# Altium PCB ESM-4G-V1.1.PcbDoc
Units mm, origin at the board's own origin, x right, y up, seen from the top; angles counter-clockwise.
Board outline 60 x 90 mm, 2 copper layers (Top Layer, Bottom Layer), stack 1.601 mm thick; 74 components, 62 nets, 279 pads, 316 vias.
Unrouted connection lines stored in the file: 1.
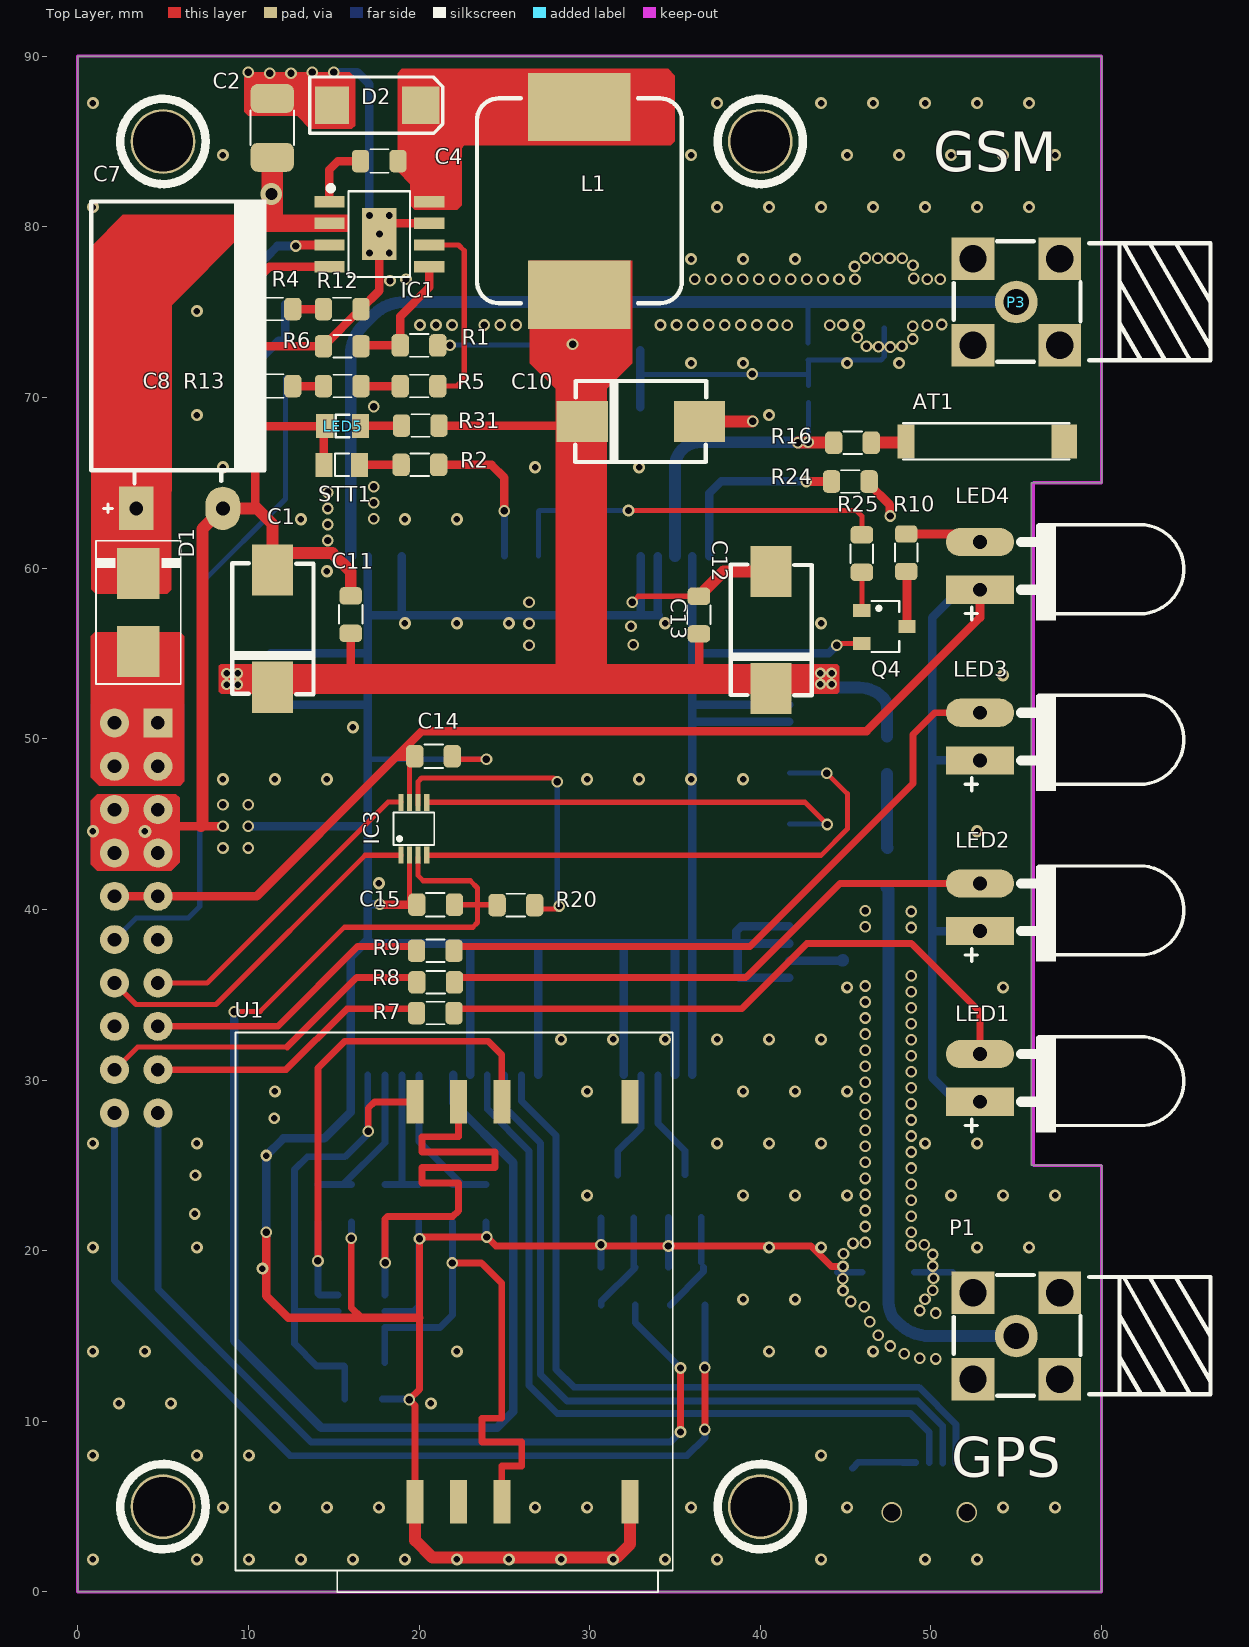
[diagram p0: Top Layer view]
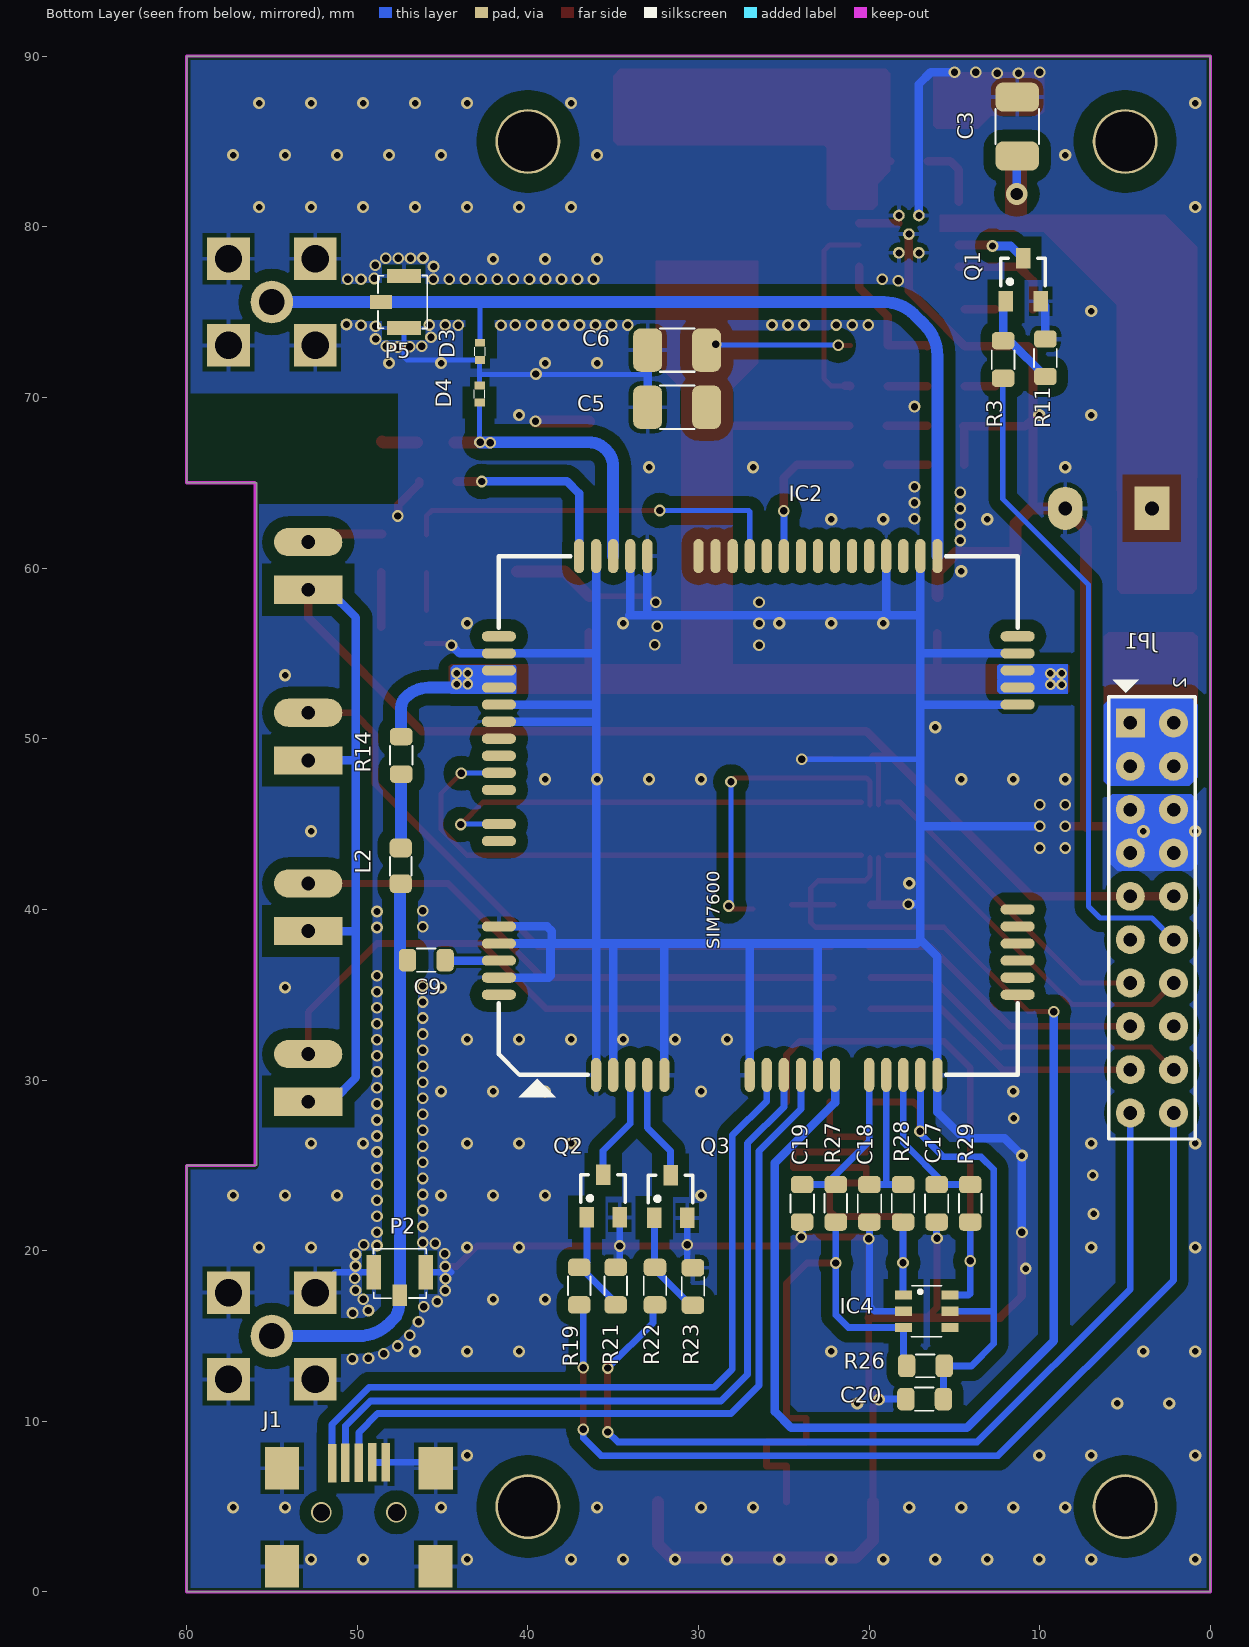
[diagram p1: Bottom Layer view, seen from below]
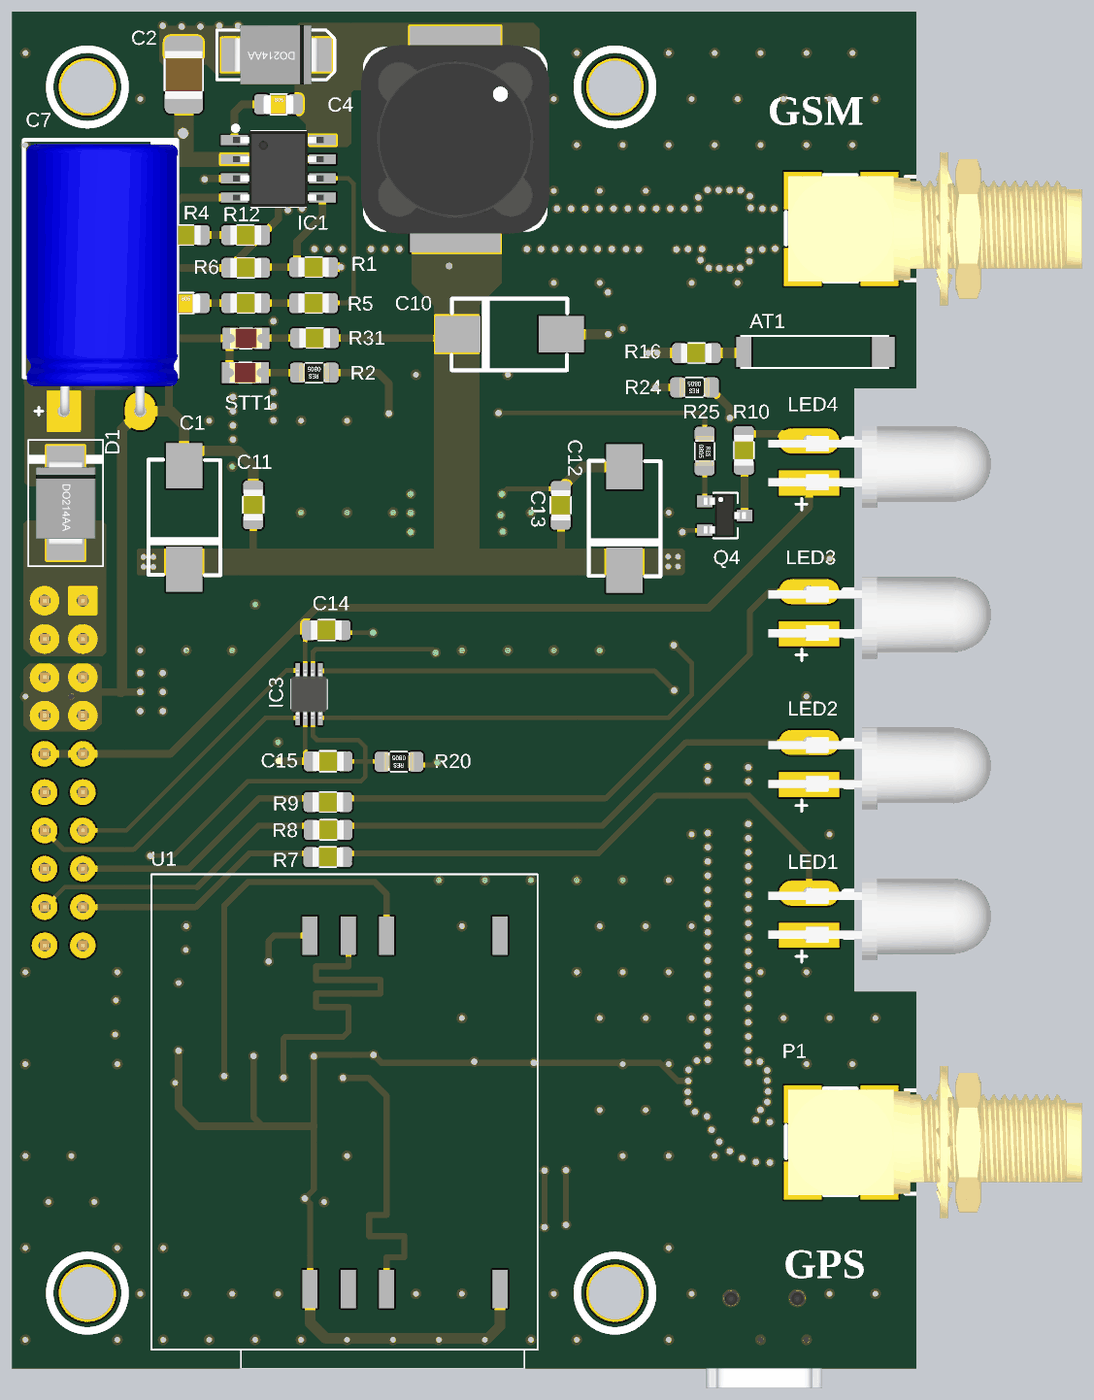
[diagram p2: 3D render of the assembled board from above, using the file's embedded part models]
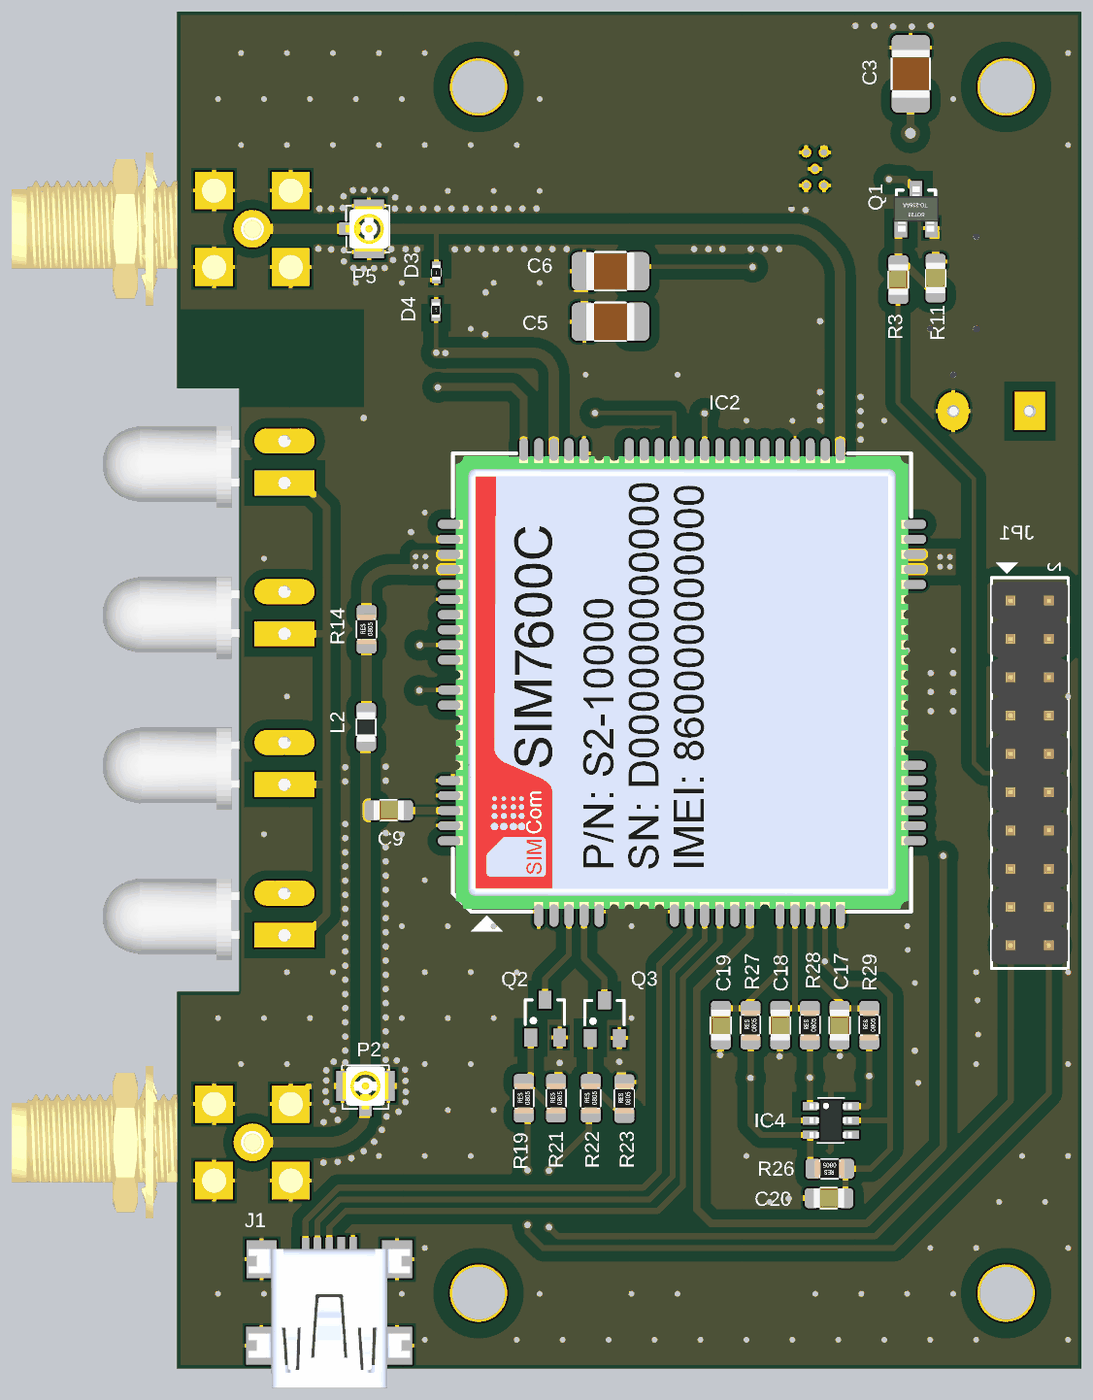
[diagram p3: 3D render of the assembled board from below, using the file's embedded part models]

## Layer stack, top to bottom
Top Solder: solder mask 0.0102, Solder Resist, Dk 3.5
Top Layer: signal copper 0.0356
Dielectric 1: core 1.53, FR-4, Dk 4
Bottom Layer: signal copper 0.0356
Bottom Solder: solder mask 0.0102, Solder Resist, Dk 3.5

## Board outline
0,0 0,90 60,90 60,65 55.88,65 55.88,25 60,25 60,0

## Design rules (kind name [scope] priority, off if disabled: settings)
Clearance Clearance_1 [OnLayer('Keep-Out Layer')] p1: gap=0.152 ignorepadtopadclearanceinfootprint=FALSE except(0: Arc-Hole Track-Hole SMDPad-Hole THPad-Hole Via-Hole Fill-Hole Poly-Hole Region-Hole Text-Hole)
Clearance Clearance_ATN [InNet('NetC9_1') or InNet('NetP1_1')] p2: gap=0.152 ignorepadtopadclearanceinfootprint=FALSE except(0: Arc-Hole Track-Hole SMDPad-Hole THPad-Hole Via-Hole Fill-Hole Poly-Hole Region-Hole Text-Hole)
Clearance Clearance_GND [inPolygon] p3: gap=0.686 ignorepadtopadclearanceinfootprint=FALSE except(0: Arc-Hole Track-Hole SMDPad-Hole THPad-Hole Via-Hole Fill-Hole Poly-Hole Region-Hole Text-Hole)
Clearance [All] p4: gap=0.152 ignorepadtopadclearanceinfootprint=FALSE except(0: Arc-Hole Track-Hole SMDPad-Hole THPad-Hole Via-Hole Fill-Hole Poly-Hole Region-Hole Text-Hole)
ComponentClearance [All] p1: gap=0.127 collisioncheckmode=3 verticalgap=0.127 showdistances=FALSE
Height [All] p1: minheight=-12.7 maxheight=25.4 prefheight=10
HoleSize [All] p1: absolutevalues=TRUE maxlimit=5 minlimit=0.025 maxpercent=80.000 minpercent=20.000
HoleToHoleClearance [All] p1: gap=0.152 allowstackedmicrovias=TRUE
MinimumSolderMaskSliver [All] p1: minsoldermaskwidth=0.051
PlaneConnect [All] p1: planeconnectstyle=Relief reliefexpansion=0.5 reliefentries=4 reliefconductorwidth=0.8 reliefairgap=0.5
PolygonConnect PolygonConnect_VIA [isvia] p1: connectstyle=Direct reliefconductorwidth=0.254 reliefentries=4 polygonreliefangle="90 Angle" airgapwidth=0.254
PolygonConnect [All] p2: connectstyle=Relief reliefconductorwidth=0.254 reliefentries=4 polygonreliefangle="90 Angle" airgapwidth=0.254
RoomDefinition ESM-4G-V1.1 [InComponentClass('ESM-4G-V1.1')] p1: confinementstyle=ConfineIn formatcopy=TRUE lockcomponents=FALSE outline -236.855,-199.263 -186.055,-199.263 -186.055,-173.863 -236.855,-173.863
RoutingVias [All] p1: holewidth=0.432 width=0.686 viastyle="Through Hole" minholewidth=0.432 minwidth=0.686 maxholewidth=0.432 maxwidth=0.686
SilkToSilkClearance [All] p1: silktosilkclearance=0.127
SilkToSolderMaskClearance [IsPad] p1: minsilkscreentomaskgap=0.025 clearancetoexposedcopper=TRUE
SolderMaskExpansion [All] p1: expansion=0.127 istentingtop=FALSE
Width Atena [InNet('NetP1_1')or InNet('NetC9_1')] p1: maxlimit=1.1 minlimit=0.7 preferedwidth=1.1
Width [All] p2: maxlimit=0.7 minlimit=0.3 preferedwidth=0.5
22 further rules are at their usual default settings.

## Components (designator, comment, footprint, x,y, rotation, side; value= is the part's Value field where it differs from the comment)
AT1 "AMCA92-2R660G-S1F-T" "Antena-Chip - LTE" 53.175,67.425 r180 top value="R1/4W - 1K"
C1 "470uF/10V" EEFSDE 11.425,56.45 r90 top
C2 "2.2uF/50V" C-1210 11.4,85.8 r270 top
C3 "2.2uF/50V" C-1210 11.325,85.875 r270 bottom
C4 "100nF" C-0805 17.673,83.852 r0 top
C5 "47uF/16V" C-1210 31.25,69.425 r180 bottom
C6 "47uF/16V" C-1210 31.25,72.775 r180 bottom
C7 "1000uF/50V" CP5-10X16N 5.969,63.5 r90 top
C8 "6.8nF" C-0805 11.5,70.666 r0 top
C9 "33pF" C-0805 45.95,37.025 r0 bottom value=103
C10 "470uF/10V" EEFSDE 33,68.6 r0 top value=1000uF/16V
C11 "100nF" C-0805 16,57.275 r90 top value=103
C12 "100uF/10V" EEFSDE 40.625,56.375 r90 top value=1000uF/16V
C13 "100nF" C-0805 36.4,57.25 r90 top value=103
C14 "100nF" C-0805 20.85,48.975 r0 top value=103
C15 "100nF" C-0805 20.975,40.275 r180 top value=103
C17 "22pF" C-0805 16.045,22.775 r270 bottom value=103
C18 "22pF" C-0805 19.985,22.775 r270 bottom value=103
C19 "22pF" C-0805 23.925,22.775 r270 bottom value=103
C20 "100nF" C-0805 16.75,11.3 r0 bottom value=103
D1 "1N5408" SMB#1 3.556,57.404 r90 top
D2 "B360C" SMB#2 17.5,87.128 r180 top
D3 "LXES15AAA1-153" R-0402 42.8,72.7 r90 bottom value="Diode c?m 1N5408"
D4 "LXES15AAA1-153" R-0402 42.825,70.2 r270 bottom value="Diode c?m 1N5408"
IC1 "TPS54360" "SOIC-8 - PW" 17.673,79.568 r0 top
IC2 "SIM7600E-H" SIM7600 26.5,45.5 r90 bottom
IC3 "TXB0102DCUR" US8 19.7,44.725 r90 top
IC4 "TPD4E001" "SOT23-6 - 2" 16.625,16.45 r180 bottom
J1 "USB-5" USB-M2 49.825,4.125 r0 bottom
JP1 "Header 10X2" JP10X2-FMD-2.54 3.429,39.497 r270 bottom
L1 "8.2uH/5A" L-L-12X12 29.4,81.525 r270 top
L2 "47nH" L-0805 47.45,42.55 r270 bottom value="150 mH"
LED1 "LED" LED-5-N 53,30 r0 top
LED2 "LED" LED-5-N 53,40 r0 top locked
LED3 "LED" LED-5-N 53,50 r0 top locked
LED4 "LED" LED-5-N 53,60 r0 top locked
LED5 "LED" LED-0805 15.525,68.325 r180 top
P1 "Antenna" IPXS_1 55,15 r0 top
P2 "Antenna" IPXS 47.5,18 r270 bottom
P3 "Antenna" IPXS_1 55,75.59 r0 top
P5 "Antenna" IPXS 48,75.59 r0 bottom
Q1 "C1815" "SOT23-3 TRAN" 10.967,76.9 r180 bottom
Q2 "C1815" SOT23#1 35.6,23.2 r180 bottom
Q3 "C1815" SOT23#1 31.647,23.168 r180 bottom
Q4 "C1815(MMBT4401)" SOT23#2 47.275,56.575 r270 top
R1 "10K" R-0805 20,73.05 r0 top
R2 "1k" R-0805 20.075,68.35 r0 top
R3 "1k" R-0805 12.15,72.225 r270 bottom
R4 "150k" R-0805 11.5,75.178 r180 top
R5 "12k" R-0805 20,70.666 r0 top
R6 "4k7" R-0805 15.5,73 r0 top
R7 "220R" R-0805 20.95,33.925 r0 top
R8 "220R" R-0805 20.975,35.725 r0 top
R9 "220R" R-0805 20.95,37.575 r0 top
R10 "220R" R-0805 48.55,60.9 r90 top
R11 "10k" R-0805 9.675,72.325 r270 bottom
R12 "12k" R-0805 15.5,75.178 r180 top
R13 "1k" R-0805 15.5,70.666 r0 top
R14 "10R" R-0805 47.425,49.025 r90 bottom value="R1/4W - 1K"
R16 "0R" R-0805 45.4,67.35 r0 top value="R1/4W - 1K"
R19 "1k" R-0805 36.991,17.925 r90 bottom
R20 "10k" R-0805 25.675,40.25 r180 top
R21 "10K" R-0805 34.85,17.925 r90 bottom
R22 "1k" R-0805 32.55,17.925 r90 bottom
R23 "10K" R-0805 30.325,17.9 r90 bottom
R24 "10k" R-0805 45.275,65.075 r180 top
R25 "470R" R-0805 45.95,60.85 r270 top value="R1/4W - 1K"
R26 "10k" R-0805 16.7,13.25 r0 bottom
R27 "22R" R-0805 21.955,22.775 r90 bottom
R28 "22R" R-0805 18.015,22.775 r90 bottom
R29 "22R" R-0805 14.075,22.775 r90 bottom
R31 "470R" R-0805 20.05,66.05 r180 top value="R1/4W - 1K"
STT1 "LED" LED-SMD-0805 15.475,66.05 r180 top value="LED 3 ly Single Colour"
U1 "Sim holder" SIM_HOLDER 22.315,17 r0 top

## Footprints (in the part's own frame and the unit in brackets; to place one, negate y for a bottom-side part, rotate by r counter-clockwise, add the part's x,y. Pads: shape width x height; smd on the part's side, far side on the other; paste and mask are expansions set on the pad)
"Antena-Chip - LTE" [mm]
  rect 1x2 smd: 1(4.625,0)
  rect 1.5x2 smd: 2(-4.625,0)
  silkscreen extent -4.95,-1.07 4.8,1.07, body extent -4.93,-0.99 4.75,0.99, height 1.21
C-0805 [mil] "Compoment SMD 80x50mil"
  rrect50% 40x52 smd: 1(-43.31,0) 2(43.31,0)
  silkscreen extent -21,-27 22,27, body extent -39,-26 39,24, height 31
C-1210 [mil]
  rrect50% 67x100 smd: 1(-68,0) 2(68,0)
  silkscreen extent -40,-50 40,50, body extent -63,-49 63,49, height 98
CP5-10X16N [mil] "Tu hoa 1000uF/16V/25V/50V"
  rect 100x80 hole 32: 1(0,100)
  oval 100x80 hole 32: 2(0,-100)
  silkscreen extent -10,-196 708,204, body extent -12,-199 697,197, height 395
EEFSDE [mm]
  rect 3x2.4 smd: 1(-3.429,0) 2(3.429,0)
  silkscreen extent -3.84,-2.39 3.84,2.36, body extent -3.81,-2.15 3.81,2.15, height 4.21
IPXS [mil] "SOT 23 _ 1-3-2"
  rect 50x33 smd: 1(24,0)
  rect 79x33 smd: 2(-29,-60) 3(-29,60)
  silkscreen extent -83,-61 31,61, body extent -80,-59 32,59, height 50
IPXS_1 [mm]
  round 2.5 hole 1.5 paste-2539.97: 1(0,0)
  rect 2.5x2.5 hole 1.6: 2(-2.54,-2.54) 2(-2.54,2.54) 2(2.54,-2.54) 2(2.54,2.54)
  silkscreen extent -3.66,-3.51 11.38,3.57, body extent -3.52,-5.11 15.98,5.09, height 11.7
JP10X2-FMD-2.54 [mm]
  rect 1.7x1.7 hole 0.8: 1(-11.43,-1.27)
  round 1.7 hole 0.8: 2(-11.43,1.27) 3(-8.89,-1.27) 4(-8.89,1.27) 5(-6.35,-1.27) 6(-6.35,1.27) 7(-3.81,-1.27) 8(-3.81,1.27) 9(-1.27,-1.27) 10(-1.27,1.27) 11(1.27,-1.27) 12(1.27,1.27) 13(3.81,-1.27) 14(3.81,1.27) 15(6.35,-1.27) 16(6.35,1.27) 17(8.89,-1.27) 18(8.89,1.27) 19(11.43,-1.27) 20(11.43,1.27)
  silkscreen extent -13.97,-2.54 12.95,2.54, body extent -12.7,-2.54 12.7,2.54, height 5.55
L-0805 [mm] "Compoment SMD 80x50mil"
  rrect50% 1.1x1.3 smd: 1(-1.05,0) 2(1.05,0)
  silkscreen extent -0.53,-0.64 0.56,0.64, body extent -1,-0.6 1,0.6, height 0.95
L-L-12X12 [mm]
  rect 4x6 smd: 1(-5.5,0) 2(5.5,0)
  silkscreen extent -6,-6 6,6, body extent -6.25,-6.25 6.25,6.25, height 6.7
LED-5-N [mil]
  rect 157.48x65 hole 32: 1(-5,-50)
  oval 157.48x65 hole 32: 2(-5,60)
  silkscreen extent -39,-120 465,100, body extent -111,-115 471,98, height 130
LED-0805 [mm]
  rect 1x1.397 smd: 1(-1.05,0) 2(1.05,0)
  silkscreen extent -0.41,-0.66 0.41,0.66, body extent -1.05,-0.67 1.05,0.68, height 0.9
LED-SMD-0805 [mm]
  rect 1x1.397 smd: 1(-1.05,0) 2(1.05,0)
  silkscreen extent -0.41,-0.66 0.41,0.66, body extent -1.05,-0.67 1.05,0.68, height 0.9
R-0402 [mm]
  rect 0.457x0.6 smd: 1(-0.5,0) 2(0.5,0)
  silkscreen extent -0.25,-0.3 0.25,0.3, body extent -0.5,-0.25 0.5,0.25, height 0.35
R-0805 [mil] "Compoment SMD 80x50mil"
  rrect50% 40x52 smd: 1(-43.31,0) 2(43.31,0)
  silkscreen extent -21,-26 22,26, body extent -40,-25 40,25, height 24
SIM7600 [mm]
  oval 2x0.6 smd: 1(-15.2,9.5) 2(-15.2,8.5) 3(-15.2,7.5) 4(-15.2,6.5) 5(-15.2,5.5) 10(-15.2,0.5) 11(-15.2,-0.5) 12(-15.2,-1.5) 13(-15.2,-2.5) 14(-15.2,-3.5) 15(-15.2,-4.5) 17(-15.2,-6.5) 18(-15.2,-7.5) 19(-15.2,-8.5) 20(-15.2,-9.5) 41(15.2,-9.5) 42(15.2,-8.5) 43(15.2,-7.5) 44(15.2,-6.5) 45(15.2,-5.5) 46(15.2,-4.5) 47(15.2,-3.5) 48(15.2,-2.5) 49(15.2,-1.5) 50(15.2,-0.5) 51(15.2,0.5) 52(15.2,1.5) 53(15.2,2.5) 54(15.2,3.5) 57(15.2,6.5) 58(15.2,7.5) 59(15.2,8.5) 60(15.2,9.5) 81(-15.2,-10.5) 82(15.2,-10.5) 85(15.2,10.5)
  oval 0.6x2 smd: 21(-9.5,-15.2) 22(-8.5,-15.2) 23(-7.5,-15.2) 24(-6.5,-15.2) 25(-5.5,-15.2) 37(6.5,-15.2) 38(7.5,-15.2) 39(8.5,-15.2) 40(9.5,-15.2) 61(9.5,15.2) 62(8.5,15.2) 63(7.5,15.2) 64(6.5,15.2) 65(5.5,15.2) 66(4.5,15.2) 67(3.5,15.2) 68(2.5,15.2) 69(1.5,15.2) 71(-0.5,15.2) 72(-1.5,15.2) 77(-6.5,15.2) 78(-7.5,15.2) 79(-8.5,15.2) 80(-9.5,15.2) 83(10.5,-15.2) 84(-10.5,-15.2) 86(-10.5,15.2) 87(10.5,15.2)
  silkscreen extent -16.52,-15.2 15.2,15.2, body extent -15.29,-15.33 15.26,15.24, height 3.18
SIM_HOLDER [mm]
  rect 1x2.54 smd: 1(-2.542,11.72) 2(-0.002,11.72) 3(2.538,11.72) 4(10.058,11.72) 5(-2.542,-11.72) 6(-0.002,-11.72) 7(2.538,-11.72) 8(10.058,-11.72)
  silkscreen extent -13.07,-17.02 12.56,15.78, body extent -12.81,-17.02 12.3,15.27, height 3.5
SMB#1 [mm]
  rect 3x2.5 smd: 1(-2.286,0) 2(2.286,0)
  silkscreen extent -4.19,-2.48 4.19,2.48, body extent -2.79,-1.97 2.79,1.97, height 2.65
SMB#2 [mm]
  rect 2x2.2 smd: 1(2.6,0)
  rect 2.2x2.2 smd: 2(-2.6,0)
  silkscreen extent -3.9,-1.65 3.9,1.65, body extent -2.79,-1.97 2.79,1.98, height 2.6
"SOIC-8 - PW" [mil]
  rect 70x26 smd: 1(-115,75) 2(-115,25) 3(-115,-25) 4(-115,-75) 5(115,-75) 6(115,-25) 7(115,25) 8(115,75)
  round 27 hole 16: 9(-23,-43) 9(-23,43) 9(0,0) 9(23,-43) 9(23,43)
  rect 80x120 smd: 9(0,0)
  silkscreen extent -118,-99 71,112, body extent -119,-99 119,99, height 63
SOT23#1 [mm] "SOT 23 _ 1-3-2"
  rect 0.85x1.2 smd: 1(-0.94,-1.245) 2(0.985,-1.25) 3(0.005,1.25)
  silkscreen extent -1.29,-0.38 1.31,1.25, body extent -1.5,-1.5 1.52,1.5, height 1.27
SOT23#2 [mm] "SOT 23 _ 1-3-2"
  rect 0.762x1.016 smd: 1(-0.94,-1.321) 2(0.985,-1.321) 3(0.005,1.321)
  silkscreen extent -1.5,-0.76 1.5,0.86, body extent -1.45,-1.4 1.45,1.4, height 1.3
"SOT23-3 TRAN" [mm] "SOT23-3 1-3-2"
  rect 0.85x1.2 smd: 1(1.016,-1.26) 2(-0.018,1.26) 3(-1.016,-1.26)
  silkscreen extent -1.32,-0.37 1.28,1.26, body extent -1.5,-1.49 1.5,1.51, height 1.3
"SOT23-6 - 2" [mm] "SOT23, 5-Leads, Body 3.0x3.0mm (max), Pitch 0.95mm, IPC Medium Density"
  rect 1x0.55 smd: 1(-1.372,0.95) 2(-1.372,0) 3(-1.372,-0.95) 4(1.372,-0.95) 5(1.372,0) 6(1.372,0.95)
  silkscreen extent -0.89,-1.5 0.89,1.5, body extent -1.4,-1.45 1.4,1.45, height 1.45
US8 [mm] "Small Outline; 8 Leads; Body Width 3.9 mm; Pitch 1.27 mm"
  rect 1x0.3 smd: 1(-1.55,0.75) 2(-1.55,0.25) 3(-1.55,-0.25) 4(-1.55,-0.75) 5(1.55,-0.75) 6(1.55,-0.25) 7(1.55,0.25) 8(1.55,0.75)
  silkscreen extent -0.94,-1.19 0.94,1.19, body extent -1.6,-1.2 1.6,1.2, height 0.9
USB-M2 [mm]
  rect 0.5x2.25 smd: 1(1.651,-3.429) 2(0.864,-3.442) 3(0.076,-3.454) 4(-0.711,-3.467) 5(-1.499,-3.48)
  rect 2x2.5 smd: 5(-4.424,-3.124) 5(-4.42,2.616) 5(4.576,-3.124) 5(4.58,2.616)
  body extent -5.27,-3.8 5.43,5.4, height 3.95

## Part data
AT1 R14 R16: library part RES, "Resistor 1/4W"
C1 C7: library part CP
C2 C3: library part CN, "part C3225X7R2A225K230AB"
C4 C5 C6 C8: library part CN
C9 C11 C13 C14 C15 C17 C18 C19 C20: library part C, "Cap SMD"
C10 C12: library part CP4, "Cap 1000uF/16V - 220uF/50V", Description 1="2200uF-3300uF/6,3V - 1000uF-2200uF/10V", Description 2="1000uF/16V - 470uF => 1000uF/25V - 100uF/100V", Description 3=330uF>470uF/35V_220uF>470uF/50V_10uF>22uF/250V, Description 4="220uF => 330uF/63V - 10uF =>33uF/160 - 200V", Description 5="4,7uF>10uF/250V_3,3uF>10uF/400V - 2,2uF>4,7uF/450V"
D1: library part Diode, "Diode S3M 3A 1000V"
D2: library part "Diode scotky", "part: B560C-13-F"
D3 D4: library part 1N5822
IC1: "TPS54360 60 V Input, 3.5 A, Step Down DC-DC Converter with Eco-mode™"
IC2: "SIM7600E-H GSM/LTE CAT4/GPS"
IC3: "2-BIT BIDIRECTIONAL VOLTAGE-LEVEL TRANSLATOR"
J1: Manufacturer=FCI, Manufacturer Part Number=10118193-0001LF, Supplier Part Number 1=609-4616-1-ND, .Checked PCB=RF, .Checked SCH=MM, .Creator=MM, Category="Connectors, Interconnects", ComponentLink1Description=http://portal.fciconnect.com/Comergent//fci/drawing/10118193.pdf, ComponentLink1URL=http://portal.fciconnect.com/Comergent//fci/drawing/10118193.pdf, Connector Type="USB - micro B", Features="Shielded, Solder Retention", Gender=Receptacle, Ingress Protection=-, Mounting Type="Surface Mount, Right Angle, Horizontal", Number of Contacts=5, Packaging="Cut Tape (CT)", Pricing 1="1=0.46, 10=0.433, 25=0.3712, 50=0.3156, 100=0.3032, 250=0.27224, 500=0.25988 (USD)", RoHS="RoHS Compliant", Specifications="USB 2.0", Stock 1=28642, Supplier 1=Digi-Key
JP1: "Header, 10-Pin, Dual row", LatestRevisionDate=17-Jul-2002, LatestRevisionNote="Re-released for DXP Platform.", Publisher="Altium Limited"
L1: library part L1, "part: 7447797820"
L2: library part "Inductor Ferit", "Ferrite Beads Rated current > 1A"
P1 P2 P3 P5: library part IPXSx66, "Antenna GSM GPS"
Q2 Q3 Q4: library part NPN, "Transistor C1815, SOT23", Name=C1815
R1 R2 R3 R4 R5 R6 R7 R8 R9 R10 R11 R12 R13 R19 R20 R21 R22 R23 R24 R25 R26 R27 R28 R29 R31: library part R, "Resistor 1/4W"
STT1: "LED Single colour Green and Red"
U1: library part Component_1, valua="Sim holder"

## Free pads (board coordinates)
  round 3.8 hole 3.5: 0(5,5) 1(40,5) 2(40,85) 3(5,85)

## Via types
v1: diameter 0.686, hole 0.432, Top Layer to Bottom Layer, tented both sides, 168 vias
v2: diameter 0.711, hole 0.381, Top Layer to Bottom Layer, tented both sides, 131 vias
v3: diameter 0.635, hole 0.381, Top Layer to Bottom Layer, tented both sides, 8 vias
v4: diameter 0.686, hole 0.381, Top Layer to Bottom Layer, tented both sides, 5 vias
v5: diameter 1.2, hole 1, Top Layer to Bottom Layer, tented both sides, 2 vias
v6: diameter 0.762, hole 0.381, Top Layer to Bottom Layer, tented both sides, 1 vias
v7: diameter 1.27, hole 0.711, Top Layer to Bottom Layer, tented both sides, 1 vias

## Nets (pads, with @x,y where several pads share a name; then routed paths per layer and width w, separated by ;. In a path a pad name is that pad's centre, name@x,y a point inside that pad or via, vN(x,y) a via of type N, cw(c..) or ccw(c..) an arc to the next point about the centre after c; other vN are vias at no path point)
1V8: C15.1 IC2.15 IC3.3 R20.2 | length 85.1
  Top Layer w0.3: v1(9.175,34) 9.2,34.025 10.7,34.025 15.625,38.95 23.15,38.95 23.425,39.225 23.425,40.275 ; IC3.3@19.95,43.025 19.95,41.975 20.25,41.675 23,41.675 23.425,41.25 23.425,40.275 ; C15.1 23.425,40.275 ; R20.2@24.55,40.275 23.425,40.275
  Bottom Layer w0.3: v1@9.1,34 v1(9.175,34)
  Bottom Layer w0.5: v1(9.175,34) 9.175,14.725 14.275,9.625 24.575,9.625 25.525,10.575 25.525,25.15 22,28.675 IC2.15
3V3: C14.1 IC3.7 JP1.9 JP1.10 LED1.1 LED2.1 LED3.1 LED4.1 | length 102
  Top Layer w0.3: IC3.7@19.45,46.125 19.45,48.525 C14.1@19.5,48.575
  Top Layer w0.5: JP1.10 10.492,40.767 17.975,48.25 20.175,50.45 46.225,50.45 52.873,57.098 LED4.1 ; 18.675,48.95 C14.1@19.75,48.95
  Bottom Layer w0.5: 50.105,38.73 LED2.1 ; 50.145,48.73 LED3.1 ; LED1.1 51.495,28.73 50.075,30.15 50.075,57.1 51.705,58.73 LED4.1
3V8: C1.1 C5.2 C6.2 C10.1 C11.1 C12.1 C13.1 IC2.38 IC2.39 IC2.62 IC2.63 L1.2 R1.2 R2.2 R14.2 | length 52
  Top Layer w0.3: R1.2 v1(21.816,73.05) ; v1(29,73.125) 29.3,73.125 29.4,73.025
  Top Layer w0.5: 16,53.9 C11.1 ; R2.2 C10.1@28.921,68.35 ; L1.2 L1.2@29.4,75.578 ; L1.2@29.5,75.678 L1.2@29.4,75.578 ; 29.75,54 29.4,54.35 29.4,73.025 L1.2@29.4,75.578 ; 36.425,53.725 C13.1@36.425,56.225
  Bottom Layer w0.3: v1(21.816,73.05) ccw(c21.816,73.134) 21.875,73.075 29.254,73.075 cw(c29.254,72.904) 29.375,73.025 29.275,73.125 v1(29,73.125)
  Bottom Layer w0.7: IC2.63 45.787,53 cw(c45.787,51.037) 47.175,52.425 cw(c46.571,51.821) 47.425,51.821 R14.2
  other v3: 8.725,53.175 9.375,53.175 43.525,53.2 44.175,53.2 8.725,53.825 9.375,53.825 43.525,53.85 44.175,53.85
A: AT1.2
CLK: IC4.6 R29.1 U1.3 | length 31.2
  Top Layer w0.4: v1(14.075,19.4) 14.075,30.7 15.65,32.275 24.05,32.275 24.853,31.472 U1.3
  Bottom Layer w0.4: R29.1 v1(14.075,19.4) 14.075,17.5 14.175,17.4 IC4.6
CTRL-SIMPW: JP1.12 R3.2 | length 38.8
  Bottom Layer w0.3: JP1.12 3.432,39.5 6.475,39.5 7.15,40.175 7.15,59.025 12.175,64.05 R3.2@12.175,71.125
D+: IC2.13 J1.3 | length 45.6
  Bottom Layer w0.4: IC2.13 24,28.3 26.45,25.85 26.45,12.1 28.1,10.45 48.8,10.45 49.901,9.349 J1.3
D-: IC2.12 J1.2 | length 45.4
  Bottom Layer w0.4: IC2.12 25,28.425 27.125,26.3 27.125,12.75 28.675,11.2 49.225,11.2 50.689,9.736 J1.2
DATA: IC4.3 R26.2 R27.1 U1.7 | length 32.6
  Top Layer w0.4: v1(21.955,19.275) 23.65,19.275 24.853,18.072 24.853,11.5 24.853,10.18 23.686,10.18 23.686,8.78 24.853,8.78 26.021,8.78 26.021,7.38 24.853,7.38 24.853,5.98 U1.7
  Bottom Layer w0.4: R26.2@17.997,13.447 IC4.3 21.225,15.5 21.955,16.23 v1(21.955,19.275) R27.1
GND: C1.2 C2.1 C3.1 C5.1 C6.1 C7.2 C8.1 C10.2 C11.2 C12.2 C13.2 C14.2 C15.2 C17.2 C18.2 C19.2 C20.2 D2.1 D3.1 D4.1 IC1.7 IC1.9 IC2.1 IC2.2 IC2.5 IC2.10 IC2.14 IC2.37 IC2.40 IC2.41 IC2.43 IC2.57 IC2.58 IC2.60 IC2.61 IC2.64 IC2.65 IC2.77 IC2.78 IC2.80 IC2.81 IC3.2 IC4.2 J1.4 J1.5 JP1.5 JP1.6 JP1.7 JP1.8 LED5.2 P1.2 P2.2 P2.3 P3.2 P5.2 P5.3 Q1.1 Q2.2 Q3.2 Q4.2 R6.1 R11.1 R12.1 R21.2 R23.2 R24.1 STT1.2 U1.5 U1.8 | length 434.7
  Top Layer w0.3: C15.2@19.45,40.275 IC3.2@19.45,43.025 ; C14.2@22.175,48.8 v1(23.95,48.8) ; v1(32.5,58) 32.85,58.35 C13.2 ; v1(44.475,55.475) 44.59,55.59 Q4.2
  Top Layer w0.4: v1(16.025,20.725) 16.025,16.675 16.625,16.075 ; U1.5 19.773,10.927 v1(19.425,11.275) 20.025,11.875 20.025,16.075 v1(20.025,20.7) 20.125,20.8 v1(23.975,20.8) 24.5,20.275 v1(34.615,20.275) 42.973,20.275 44.173,19.075 v1(44.849,19.075)
  Top Layer w0.5: 5.75,44.875 7.225,44.875 v1(8.509,44.875) ; 10.4,63.6 10.4,68.775 ; v1(11.05,21.075) 11.05,17.35 12.325,16.075 16.625,16.075 20.025,16.075 ; STT1.2 LED5.2@14.425,68.275 ; LED5.2 10.85,68.325 10.4,68.775 ; IC1.9@17.673,79.568 17.673,76.252 R12.1 16.578,75.178 R6.1 10.675,73 10.4,72.725 C8.1 10.4,68.775 ; v1(17.7,40.3) 17.725,40.275 19.45,40.275 C15.2 ; IC1.9@18.308,80.203 IC1.7 ; R24.1 46.375,64.923 47.582,63.715 47.582,63.086 v1(47.618,63.05)
  Top Layer w0.7: 7.225,44.875 7.3,44.95 7.3,62.291 C7.2 10.5,63.5 11.425,62.575 11.425,60.875 14.925,60.875 16,59.8 C11.2 ; U1.5 19.773,3.027 20.791,2.009 31.584,2.009 32.373,2.798 U1.8 ; C13.2 37.854,59.804 C12.2 ; C10.2 v1(39.55,68.6)
  Bottom Layer w0.3: 17.025,48.8 v1(23.95,48.8) v1@23.95,48.625 ; 32.977,71.3 33.027,71.35 v1@39.529,71.35 ; v1(39.529,71.375) v1@39.529,71.35 ; D4.1 42.825,71.35 ; P5.3 47.263,72.388 47.075,72.2 D3.1 cw(c42.74,72.14) 42.825,72.14 42.825,71.35 ; v1@39.529,71.35 42.825,71.35
  Bottom Layer w0.4: v1(16.025,20.725) 16.045,20.745 C17.2 ; C20.2 19.4,11.3 v1(19.425,11.275) ; IC4.2 19.675,16.45 19.985,16.76 C18.2 ; C19.2 23.925,20.85 v1(23.975,20.8) ; R23.2@30.661,19.025 v1(30.661,20.35) Q3.2 ; R21.2@34.615,19.025 v1(34.615,20.275) Q2.2 ; v1(44.849,19.075) 44.511,18.737 P2.3 ; J1.5@45.401,7.249 45.757,7.605 48.326,7.605 48.339,7.592 J1.4 ; P2.2 51.263,18.737 P1.2@52.46,17.54
  Bottom Layer w0.5: R11.1 9.675,75.364 Q1.1 ; v1(10,44.875) 16.875,44.875 ; v1(11.05,21.075) v4(11.05,25.575) 12.05,26.575 14.45,26.575 16,28.125 IC2.81 16,37.225 17,38.225 ; IC2.37 16.95,52 ; IC2.40 16.95,55 ; v1(15,89.057) 16.393,89.057 17.089,88.361 IC1.9@17.089,80.66 ; IC2.41 17,57.225 ; v1(17.7,40.3) 17,40.3 ; IC2.43 19,57.425 18.8,57.225 ; IC2.14 23,37.9 22.9,38 ; IC2.10 27,37.925 ; IC2.5 32,37.925 ; C5.1 32.977,71.3 C6.1 ; 33,57.25 IC2.57 ; IC2.58 34,57.275 34.05,57.225 18.8,57.225 ; IC2.2 35,37.95 ; IC2.1 36,38 ; IC2.60 36,38 ; 36.025,51 IC2.65 ; 36.05,52 IC2.64 ; 36.125,55 IC2.61 44,55 v1(44.475,55.475) ; IC2.80 38.775,36 38.675,36.1 38.675,38 ; IC2.78 38.675,38 ; IC2.77 38.875,39 38.6,38.725 38.6,38 ; 17,38.225 17,40.3 ; 17,38.225 17.225,38 22.9,38 ; 17,40.3 17,57.225 ; 17,57.225 18.8,57.225 ; 22.9,38 36,38 ; 36,38 38.6,38 ; 38.6,38 38.675,38
  other v1: 50.283,13.657 49.344,13.702 48.439,13.955 47.618,14.413 46.92,15.042 46.409,15.831 50.273,16.343 49.345,16.493 46.099,16.718 45.303,17.025 49.65,17.15 44.849,17.667 50.1,17.675 44.825,18.35 50.15,18.38 50.1,19.1 50.1,19.775 44.875,19.819 48.843,20.3 49.609,20.35 45.428,20.425 46.157,20.475 48.843,21.082 46.157,21.415 48.843,22.022 46.157,22.355 48.843,22.962 46.157,23.295 48.843,23.901 46.157,24.234 48.843,24.841 46.157,25.174 48.843,25.781 46.157,26.114 48.843,26.721 46.157,27.054 48.843,27.661 46.157,27.994 48.843,28.6 46.157,28.933 48.843,29.54 46.157,29.873 48.843,30.48 46.157,30.813 48.843,31.42 46.157,31.753 48.843,32.36 46.157,32.693 48.843,33.299 46.157,33.632 48.843,34.239 46.157,34.572 48.843,35.179 46.157,35.512 48.843,36.119 48.843,38.938 46.157,38.983 48.843,39.878 46.157,39.922 8.509,43.6 10,43.6 8.509,46.125 10,46.125 26.45,55.475 32.557,55.5 32.425,56.6 26.45,56.75 26.45,58 14.657,61.616 14.657,62.555 17.343,62.886 14.657,63.495 17.343,63.826 14.657,64.435 17.343,64.766 17.343,69.465 47.618,72.95 46.925,72.975 46.225,73 48.3,73 48.925,73.425 45.675,73.525 48.925,74.175 41.575,74.225 44.075,74.225 49.775,74.225 20.058,74.247 20.997,74.247 21.937,74.247 23.817,74.247 24.757,74.247 25.696,74.247 34.155,74.247 35.094,74.247 36.034,74.247 36.974,74.247 37.914,74.247 38.854,74.247 39.793,74.247 40.733,74.247 44.841,74.247 45.781,74.247 50.625,74.275 18.3,76.835 19.235,76.934 36.151,76.934 37.091,76.934 38.031,76.934 38.97,76.934 39.91,76.934 40.85,76.934 41.79,76.934 42.73,76.934 43.669,76.934 44.609,76.934 45.549,76.934 49.775,76.925 50.55,76.925 49,76.975 45.525,77.675 48.95,77.75 46.875,78.16 47.6,78.16 48.325,78.15 46.147,78.175 11.25,89 12.5,89 10,89.057 13.75,89.057
  other v2: 0.889,1.905 6.985,1.905 10.033,1.905 13.081,1.905 16.129,1.905 19.177,1.905 22.225,1.905 25.273,1.905 28.321,1.905 31.369,1.905 34.417,1.905 37.465,1.905 43.561,1.905 49.657,1.905 52.705,1.905 8.509,4.953 11.557,4.953 14.605,4.953 17.653,4.953 26.797,4.953 29.845,4.953 35.941,4.953 45.085,4.953 54.229,4.953 57.277,4.953 0.889,8.001 6.985,8.001 10.033,8.001 43.561,8.001 2.413,11.049 5.461,11.049 20.701,11.049 0.889,14.097 3.937,14.097 22.225,14.097 40.513,14.097 43.561,14.097 46.609,14.097 38.989,17.145 42.037,17.145 0.889,20.193 6.985,20.193 40.513,20.193 43.561,20.193 52.705,20.193 55.753,20.193 29.845,23.241 38.989,23.241 42.037,23.241 45.085,23.241 51.181,23.241 54.229,23.241 57.277,23.241 0.889,26.289 6.985,26.289 37.465,26.289 40.513,26.289 43.561,26.289 49.657,26.289 52.705,26.289 11.557,29.337 29.845,29.337 38.989,29.337 42.037,29.337 45.085,29.337 28.321,32.385 31.369,32.385 34.417,32.385 37.465,32.385 40.513,32.385 43.561,32.385 45.085,35.433 54.229,35.433 17.653,41.529 0.889,44.577 3.937,44.577 52.705,44.577 8.509,47.625 11.557,47.625 14.605,47.625 29.845,47.625 32.893,47.625 35.941,47.625 38.989,47.625 16.129,50.673 54.229,53.721 19.177,56.769 22.225,56.769 25.273,56.769 34.417,56.769 43.561,56.769 14.605,59.817 13.081,62.865 19.177,62.865 22.225,62.865 8.509,65.913 26.797,65.913 32.893,65.913 6.985,68.961 10.033,68.961 40.513,68.961 35.941,72.009 38.989,72.009 45.085,72.009 48.133,72.009 6.985,75.057 35.941,78.105 38.989,78.105 42.037,78.105 0.889,81.153 37.465,81.153 40.513,81.153 43.561,81.153 46.609,81.153 49.657,81.153 52.705,81.153 55.753,81.153 8.509,84.201 35.941,84.201 45.085,84.201 48.133,84.201 51.181,84.201 54.229,84.201 57.277,84.201 0.889,87.249 37.465,87.249 43.561,87.249 46.609,87.249 49.657,87.249 52.705,87.249 55.753,87.249
  other v4: 10.825,18.95 6.85,22.15 6.897,24.425 11.525,27.766
  other v6: 3.937,44.577
LED4: JP1.17 R7.1 | length 16.7
  Top Layer w0.4: JP1.17 12.2,30.607 15.768,34.175 R7.1@19.9,34.175
LED5: JP1.18 R8.1 | length 20
  Top Layer w0.3: JP1.18 2.182,30.607 3.5,31.925 12.275,31.925
  Top Layer w0.4: 12.275,31.925 16.35,36 R8.1@19.9,36
LED6: JP1.15 R9.1 | length 17.3
  Top Layer w0.4: JP1.15 11.722,33.147 16.4,37.825 R9.1@20.025,37.825
LED_NET: IC2.51 R25.1 | length 22.8
  Top Layer w0.3: v1(32.275,63.375) 45.625,63.375 45.95,63.05 R25.1
  Bottom Layer w0.3: IC2.51 27,63.325 27.05,63.375 v1(32.275,63.375)
NetAT1_1: AT1.1 R16.2 | length 2.1
  Top Layer w0.7: R16.2 48.369,67.35 ccw(c48.369,67.606) AT1.1
NetC2_2: C2.2 C3.2 C7.1 D1.2 IC1.2 | length 5.8
  Top Layer w1.27: 11.4,80.5 C2.2
  Bottom Layer w0.5: C3.2 11.35,84.123 v7(11.35,81.925)
NetC4_1: C4.1 IC1.1 | length 3.9
  Top Layer w0.5: IC1.1 14.752,83.352 15.252,83.852 C4.1
NetC4_2: C4.2 D2.2 IC1.8 L1.1 | length 4
  Top Layer w0.5: C4.2 20.198,83.852 20.594,83.456 IC1.8
NetC8_2: C8.2 R13.1 | length 1.8
  Top Layer w0.5: C8.2 R13.1
NetC9_1: C9.1 IC2.79 | length 3.2
  Bottom Layer w0.5: IC2.79 C9.1@44.79,37
  Bottom Layer w0.7: C9.1@44.79,37 ccw(c44.79,37.085) C9.1
NetC9_2: C9.2 L2.2 P1.1 P2.1 | length 32.8
  Bottom Layer w0.7: L2.2@47.4,41.275 47.5,41.175 P2.1 47.5,17.156 ccw(c49.841,17.156) 47.742,16.119 48.117,15.744 ccw(c49.913,17.54) 49.913,15 P1.1
NetC17_1: C17.1 IC2.19 R29.2 | length 9.9
  Bottom Layer w0.4: R29.2 15.075,23.875 ; C17.1 15.075,23.875 ; IC2.19 18,26.325 15.55,23.875 15.075,23.875
NetC18_1: C18.1 IC2.18 R28.2 | length 8.4
  Bottom Layer w0.4: R28.2 C18.1 ; 19,23.9 IC2.18
NetC19_1: C19.1 IC2.17 R27.2 | length 9.9
  Bottom Layer w0.4: IC2.17 20,26.4 22.525,23.875 22.94,23.875 ; R27.2 22.94,23.875 ; C19.1 22.94,23.875
NetD3_2: D3.2 IC2.82 P3.1 P5.1 | length 54.9
  Bottom Layer w0.3: D3.2 42.8,75.409 cw(c43.056,75.409) 42.875,75.59
  Bottom Layer w0.7: IC2.82 16,72.448 cw(c18.54,72.448) 16.744,74.244 17.346,74.846 cw(c19.143,73.05) 19.143,75.59 42.875,75.59 P5.1 P3.1
NetD4_2: D4.2 IC2.59 R16.1 | length 18.3
  Top Layer w0.7: v1(42.2,67.35) 42.74,67.35 ccw(c42.74,67.435) v1(42.8,67.375) 42.825,67.35 R16.1
  Bottom Layer w0.3: v1(42.8,67.375) ccw(c42.74,67.435) 42.825,67.435 D4.2
  Bottom Layer w0.7: IC2.59 35,65.924 cw(c36.451,65.924) 35.425,66.95 cw(c36.451,65.924) 36.451,67.375 v1@42.2,67.375 ; v1(42.2,67.35) 42.74,67.35 ccw(c42.74,67.435) v1(42.8,67.375)
NetIC1_3: IC1.3 Q1.2 | length 4.2
  Top Layer w0.5: v1(12.775,78.875) 12.717,78.933 IC1.3
  Bottom Layer w0.5: Q1.2 11.699,78.875 v1(12.775,78.875) v1@12.775,78.837
NetIC1_4: IC1.4 R4.2 | length 6.3
  Top Layer w0.5: R4.2 10.4,76.825 11.238,77.663 IC1.4
NetIC1_5: IC1.5 R1.1 R6.2 | length 7.6
  Top Layer w0.5: R6.2 16.65,73.05 R1.1 18.9,74.75 20.594,76.444 IC1.5
NetIC1_6: IC1.6 R5.2 | length 11.4
  Top Layer w0.3: IC1.6 22.317,78.933 22.65,78.6 22.65,71.1 22.225,70.675 R5.2@21.425,70.675
  Top Layer w0.5: R5.2 21.109,70.675 R5.2@21.425,70.675
NetIC2_3: IC2.3 Q2.3 | length 6.5
  Bottom Layer w0.4: IC2.3 34,27.45 35.595,25.855 Q2.3
NetIC2_4: IC2.4 Q3.3 | length 6.4
  Bottom Layer w0.4: Q3.3 31.642,25.842 33,27.2 IC2.4
NetIC2_85: IC2.85 R24.2 | length 11.2
  Top Layer w0.5: v1(42.7,65.075) R24.2
  Bottom Layer w0.5: IC2.85 37,64.375 37.725,65.1 42.7,65.1 v1(42.7,65.075)
NetIC3_6: IC3.6 R20.1 | length 18.5
  Top Layer w0.3: IC3.6@19.95,46.125 19.95,47.5 20.15,47.7 27.875,47.7 v1(28.1,47.475) ; R20.1@26.8,40.025 28.05,40.025 v1(28.225,40.2)
  Bottom Layer w0.3: v1(28.1,47.475) 28.1,40.325 v1(28.225,40.2)
NetL2_1: L2.1 R14.1 | length 4.3
  Bottom Layer w0.7: R14.1 47.425,43.66 ccw(c47.51,43.66) L2.1
NetLED1_2: LED1.2 R7.2 | length 36.5
  Top Layer w0.4: R7.2@22.1,34.175 38.9,34.175 42.725,38 48.85,38 52.873,33.977 LED1.2
NetLED2_2: LED2.2 R8.2 | length 33.1
  Top Layer w0.4: R8.2@22.1,36 39.15,36 44.674,41.524 LED2.2
NetLED3_2: LED3.2 R9.2 | length 38
  Top Layer w0.4: R9.2@22.225,37.825 39.4,37.825 48.95,47.375 48.95,50.25 50.224,51.524 LED3.2
NetLED4_2: LED4.2 R10.2 | length 4.5
  Top Layer w0.508: R10.2 52.397,62 LED4.2
NetLED5_1: LED5.1 R2.1 | length 2.4
  Top Layer w0.5: LED5.1@16.6,68.35 R2.1
NetQ1_3: Q1.3 R3.1 R11.2 | length 5.5
  Bottom Layer w0.5: R11.2 11.775,73.325 R3.1 Q1.3@12.15,75.473
NetQ2_1: Q2.1 R19.2 R21.1 | length 5.6
  Bottom Layer w0.4: R21.1@34.727,16.825 36.675,18.773 R19.2@36.675,19.025 ; R19.2@36.54,19.325 Q2.1
NetQ3_1: Q3.1 R22.2 R23.1 | length 5.9
  Bottom Layer w0.4: R23.1@30.675,16.825 30.675,17.025 R22.2@32.675,19.025 ; R22.2@32.587,19.025 Q3.1
NetQ4_1: Q4.1 R25.2 | length 2.2
  Top Layer w0.3: Q4.1@45.95,57.519 R25.2
NetR4_1: R4.1 R12.2 | length 1.8
  Top Layer w0.5: R4.1 R12.2
NetR5_1: R5.1 R13.2 | length 2.3
  Top Layer w0.5: R13.2 R5.1
NetR31_2: R31.2 STT1.1 | length 2.4
  Top Layer w0.5: STT1.1 R31.2
RST: IC4.1 R28.1 U1.2 | length 30.6
  Top Layer w0.4: v1(18.015,19.3) 18.015,21.865 18.15,22 21.975,22 22.313,22.338 22.313,22.45 22.313,23.975 20.173,23.975 20.173,24.875 22.313,24.875 24.454,24.875 24.454,25.775 22.313,25.775 20.173,25.775 20.173,26.675 22.313,26.675 22.313,27.575 22.313,28.025 U1.2
  Bottom Layer w0.4: IC4.1 18.015,17.418 v1(18.015,19.3) R28.1
RX-SIM: IC2.68 IC3.4 | length 31.3
  Top Layer w0.3: IC3.4 43.565,43.175 45.1,44.71 45.1,46.775 v1(43.9,47.975)
  Bottom Layer w0.3: IC2.68 43.9,48 v1(43.9,47.975)
SIM-CTS: JP1.11
SIM-DTR: JP1.16
SIM-PWON: JP1.20 R19.1 | length 56.9
  Top Layer w0.4: v1(36.75,9.525) v1(36.75,13.15)
  Bottom Layer w0.4: JP1.20 2.159,18.266 12.44,7.985 35.711,7.985 36.75,9.025 v1(36.75,9.525) ; v1(36.75,13.15) R19.1@36.75,16.825
SIM-RST: JP1.19 R22.1 | length 53.5
  Top Layer w0.4: v1(35.325,9.375) v1(35.325,13.125)
  Bottom Layer w0.4: JP1.19 4.699,17.751 13.67,8.78 34.73,8.78 v1(35.325,9.375) ; R22.1@32.675,16.825 32.675,15.775 v1(35.325,13.125)
SIM-RXD: IC3.1 JP1.14 | length 20.9
  Top Layer w0.3: JP1.14 3.421,34.425 8.1,34.425 16.85,43.175 18.8,43.175 IC3.1
SIM-TXD: IC3.8 JP1.13 | length 18.6
  Top Layer w0.3: JP1.13 7.587,35.687 18.2,46.3 IC3.8@18.95,46.3
SIM_LED: Q4.3 R10.1 | length 3.2
  Top Layer w0.508: Q4.3 R10.1@48.596,59.754
STATUS: IC2.49 R31.1 | length 8.8
  Top Layer w0.5: R31.1 24.25,66.05 25,65.3 v1(25,63.35)
  Bottom Layer w0.4: IC2.49 v1(25,63.35)
TX-SIM: IC2.71 IC3.5 | length 26.2
  Top Layer w0.3: IC3.5 42.625,46.275 v1(43.925,44.975)
  Bottom Layer w0.3: IC2.71 43.9,45 v1(43.925,44.975)
V_USIM: C20.1 IC2.20 IC4.5 R26.1 U1.1 | length 30.8
  Top Layer w0.4: v1(17.025,27) 17.025,28.35 17.395,28.72 U1.1
  Bottom Layer w0.4: 12.7,16.45 12.7,24.75 13.45,25.5 15.65,25.5 v1@17,26.85 ; IC4.5 12.75,16.45 12.7,16.4 12.7,14.55 14,13.25 R26.1 ; C20.1 R26.1@15.65,13.2 ; v1@17,27 IC2.20
VBUS: IC2.11 J1.1 | length 45.1
  Bottom Layer w0.4: IC2.11 26,28.775 28.025,26.75 28.025,13.05 29.075,12 49.289,12 51.476,9.813 J1.1
VDD_AUX: IC2.44
VIN: D1.1 JP1.1 JP1.2 JP1.3 JP1.4
pads on no net: IC2.21 IC2.22 IC2.23 IC2.24 IC2.25 IC2.42 IC2.45 IC2.46 IC2.47 IC2.48 IC2.50 IC2.52 IC2.53 IC2.54 IC2.66 IC2.67 IC2.69 IC2.72 IC2.83 IC2.84 IC2.86 IC2.87 IC4.4 U1.4 U1.6
copper on no net:
  other v5: 47.701,4.669 52.101,4.669

## Polygon pours and split planes (outlines as drawn)
GND on Bottom Layer "Bottom Layer-No Net" (solid, remove dead copper, pour order 8): 0,90 0,0 60,0 60,90

## Keep-outs
Keep-Out Layer:
  lines w0.178: 0,0 0,90 60,90 60,65 56,65 56,25 60,25 60,0 0,0

## Other copper
Top Layer:
  pour cut-out: 40,2 cw(c40,5) 37,5 cw(c40,5) 40,8 cw(c40,5) 43,5 cw(c40,5)
  pour cut-out: 5,2 cw(c5,5) 2,5 cw(c5,5) 5,8 cw(c5,5) 8,5 cw(c5,5)
  pour cut-out: 40,82 cw(c40,85) 37,85 cw(c40,85) 40,88 cw(c40,85) 43,85 cw(c40,85)
  pour cut-out: 5,82 cw(c5,85) 2,85 cw(c5,85) 5,88 cw(c5,85) 8,85 cw(c5,85)
  pour cut-out: 60,70.25 47.582,70.25 47.582,63.75 60,63.75
  region net 3V8: 32.5,78 32.5,72 31,70.5 31,78
  region net 3V8: 26.5,78 26.5,72 28,70.5 28,54 28.4,53.6 30.9,53.6 31,53.7 31,78
  pour cut-out: 23.75,87.25 23.75,75 35,75 35,87.3
  region net GND: 9.75,88.75 9.75,86.75 10,86.5 12.85,86.5 13.6,85.75 16.07,85.75 16.25,85.93 16.25,88.75 15.943,89.057 10,89.057
  region net NetC4_2: 19,89.25 18.75,89 18.75,83.25 19.5,82.5 19.5,81.25 19.75,81 22.25,81 22.5,81.25 22.5,84.615 22.65,84.765 34.765,84.765 35,85 35,88.865 34.615,89.25
  region net 3V8: 8.375,54.375 8.275,54.275 8.275,52.75 8.4,52.625 44.5,52.625 44.625,52.75 44.625,54.25 44.5,54.375
  region net VIN: 1,56.25 0.75,56 0.75,47.75 1.25,47.25 6,47.25 6.25,47.5 6.25,56 6,56.25
  region net GND: 1.139,46.75 0.75,46.361 0.75,42.639 1.139,42.25 5.469,42.25 5.969,42.75 5.969,46.531 5.75,46.75
  region net NetC2_2: 0.8,65.25 0.8,58.75 1.05,58.5 5.25,58.5 5.469,58.719 5.469,65.016 5.235,65.25
  region net NetC2_2: 15.87,80.7 2.65,80.7 0.787,78.837 0.787,65.263 1.55,64.5 5.5,64.5 5.5,75.4 9.8,79.7 15.87,79.7
Bottom Layer:
  pour cut-out: 40,2 cw(c40,5) 37,5 cw(c40,5) 40,8 cw(c40,5) 43,5 cw(c40,5)
  pour cut-out: 5,2 cw(c5,5) 2,5 cw(c5,5) 5,8 cw(c5,5) 8,5 cw(c5,5)
  pour cut-out: 40,82 cw(c40,85) 37,85 cw(c40,85) 40,88 cw(c40,85) 43,85 cw(c40,85)
  pour cut-out: 5,82 cw(c5,85) 2,85 cw(c5,85) 5,88 cw(c5,85) 8,85 cw(c5,85)
  pour cut-out: 60,70.25 47.582,70.25 47.582,63.75 60,63.75
  region net 3V8: 12.375,54.375 12.475,54.275 12.5,54.275 12.5,53.475 12.475,53.45 12.5,53.425 12.5,52.775 12.35,52.625 8.35,52.625 8.35,54.375
  region net 3V8: 40.75,54.3 40.675,54.225 40.675,52.675 40.725,52.625 44.525,52.625 44.525,54.15 44.375,54.3
  region net VIN: 1.25,52.5 0.75,52 0.75,47.75 1.25,47.25 6,47.25 6.25,47.5 6.25,52 5.75,52.5
  region net GND: 1.139,46.75 0.75,46.361 0.75,42.639 1.139,42.25 5.469,42.25 5.969,42.75 5.969,46.531 5.75,46.75

## Silkscreen, mask and mechanical layers (free items; w line width, h text height)
Top Overlay:
  circle w0.5: c40,5 r2.5
  circle w0.5: c5,5 r2.5
  circle w0.5: c5,85 r2.5
  circle w0.5: c40,85 r2.5
  text "GSM" at 50.131,82.5 h4
  text "GPS" at 51.181,6 h4

## Text inside footprints (layer, text, board x,y; h text height)
IC2: Bottom Overlay "SIM7600" at 28.75,37.663 h0.76 r270
JP1: Bottom Overlay "2" at 1.43,53.596 h0.76 r270